# Altium PCB Controller.PcbDoc
Units mil, origin at the board's own origin, x right, y up, seen from the top; angles counter-clockwise.
Board outline 6000 x 4000 mil, 2 copper layers (Top Layer, Bottom Layer); 52 components, 35 nets, 186 pads, 0 vias.
Unrouted connection lines stored in the file: 109.
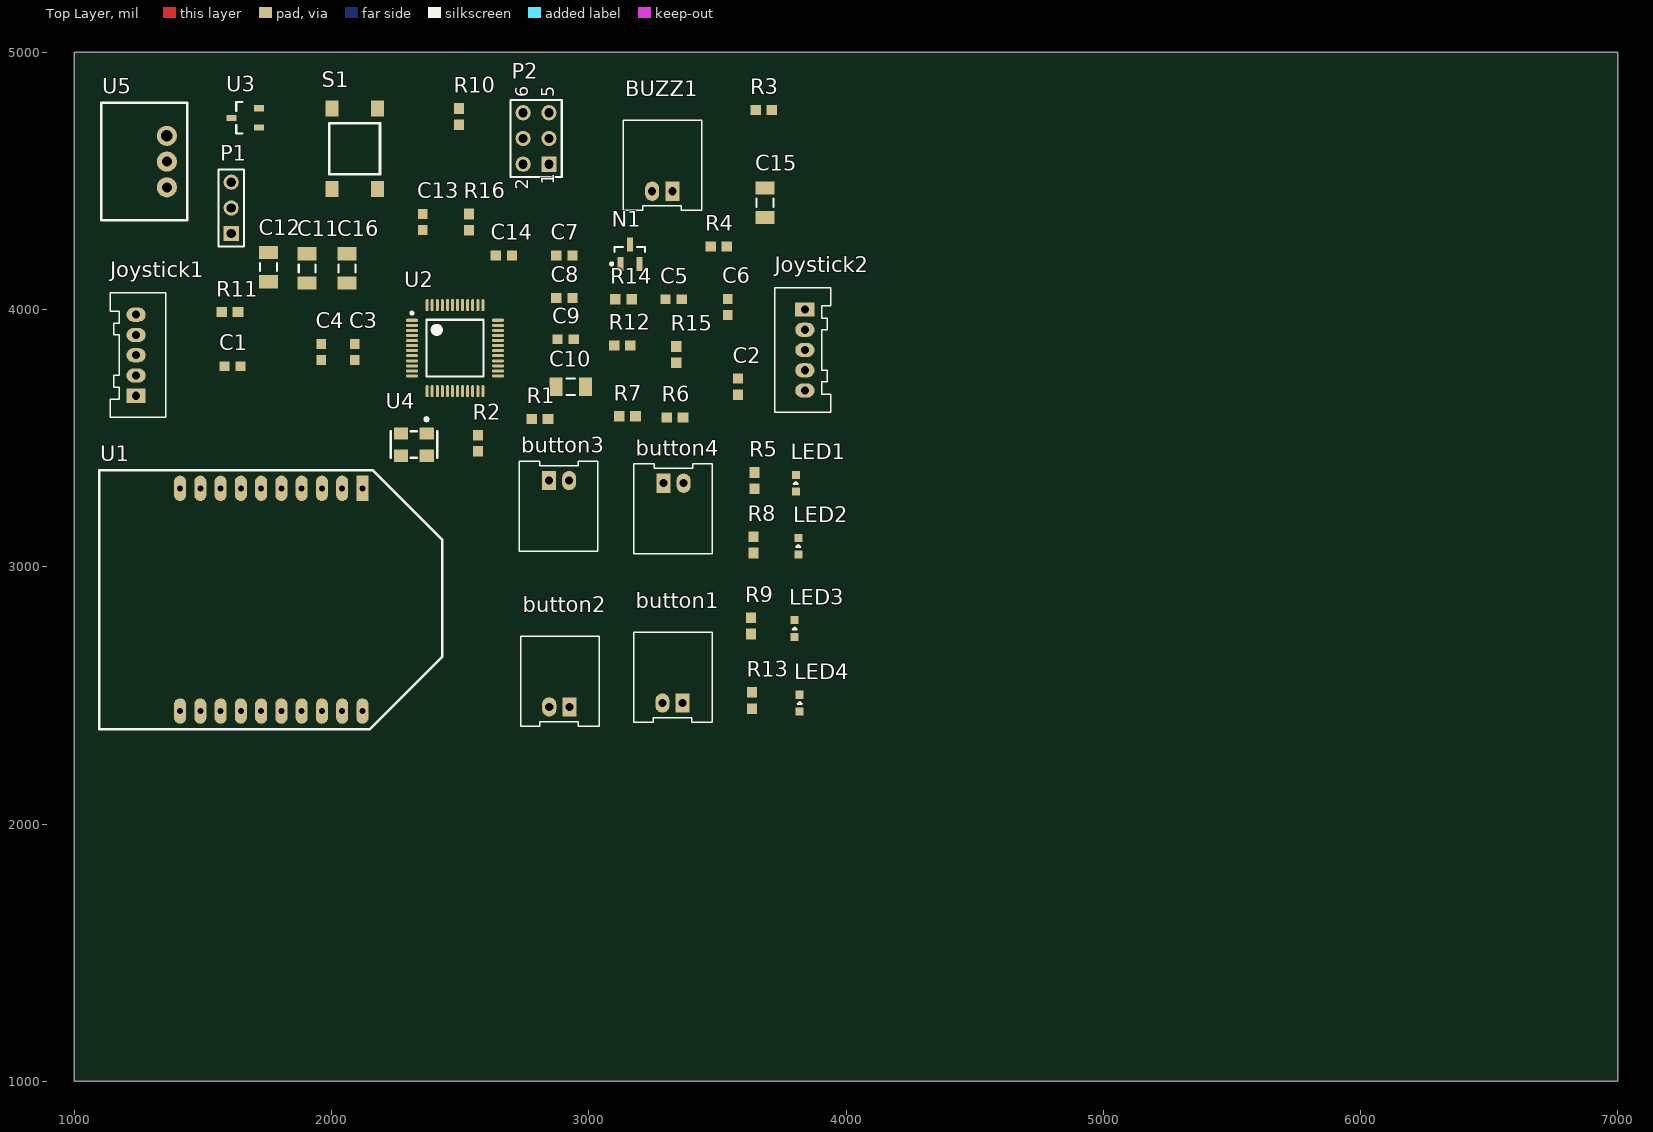
[diagram p0: Top Layer view]
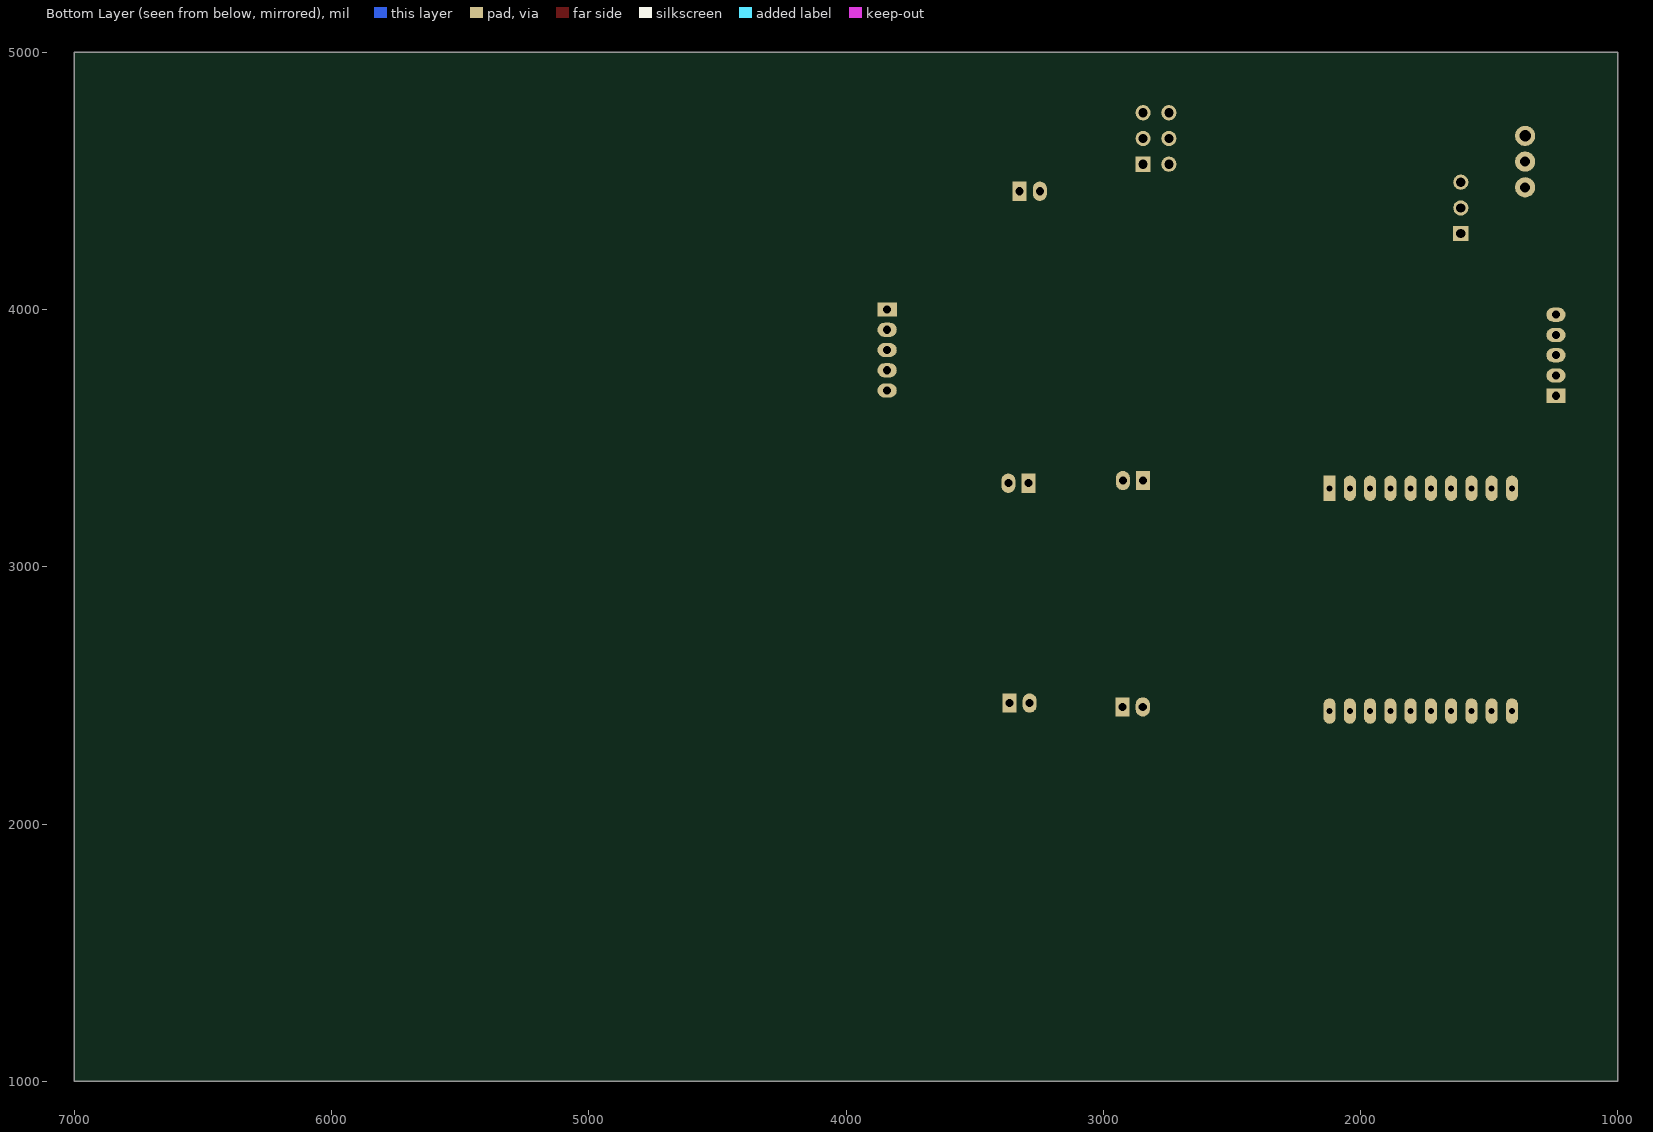
[diagram p1: Bottom Layer view, seen from below]

## Layer stack, top to bottom
Top Solder: solder mask 0.4, Solder Resist, Dk 3.5
Top Layer: signal copper 1.4
Dielectric 1: dielectric 12.6, FR-4, Dk 4.8
Bottom Layer: signal copper 1.4
Bottom Solder: solder mask 0.4, Solder Resist, Dk 3.5

## Board outline
1000,1000 7000,1000 7000,5000 1000,5000

## Design rules (kind name [scope] priority, off if disabled: settings)
Clearance [All] p1: gap=5
PolygonConnect [All] p1: connectstyle=Relief reliefconductorwidth=10 reliefentries=4 polygonreliefangle="90 Angle" airgapwidth=10
RoutingVias [All] p1: holewidth=17 width=25 viastyle="Through Hole" minholewidth=17 minwidth=25 maxholewidth=17 maxwidth=25
SolderMaskExpansion [All] p1: expansion=4
UnpouredPolygon [All] p1: allowunpoured=FALSE
Width [All] p1: maxlimit=30 minlimit=7 preferedwidth=25
29 further rules are at their usual default settings.

## Components (designator, comment, footprint, x,y, rotation, side; value= is the part's Value field where it differs from the comment)
button1 "2-pin Horz Sherlock" MOLEX-HDR-1X2-SHERLOCK-HORZ 3365,2470 r0 top
button2 "2-pin Horz Sherlock" MOLEX-HDR-1X2-SHERLOCK-HORZ 2925,2455 r0 top
button3 "2-pin Horz Sherlock" MOLEX-HDR-1X2-SHERLOCK-HORZ 2845,3335 r180 top
button4 "2-pin Horz Sherlock" MOLEX-HDR-1X2-SHERLOCK-HORZ 3290,3325 r180 top
BUZZ1 "2-pin Horz Sherlock" MOLEX-HDR-1X2-SHERLOCK-HORZ 3325,4460 r0 top
C1 "Cap" CAPC0603 1615,3780 r180 top
C2 "Cap" CAPC0603 3580,3700 r90 top
C3 "Cap" CAPC0603 2090,3835 r90 top
C4 "Cap" CAPC0603 1960,3835 r90 top
C5 "Cap" CAPC0603 3330,4040 r0 top
C6 "Cap" CAPC0603 3540,4010 r270 top
C7 "Cap" CAPC0603 2905,4210 r0 top
C8 "Cap" CAPC0603 2905,4045 r0 top
C9 "Cap" CAPC0603 2910,3885 r0 top
C10 "Cap" CAPC1206 2930,3700 r180 top
C11 "Cap" CAPC1206 1905,4160 r270 top
C12 "Cap" CAPC1206 1755,4165 r270 top
C13 "Cap" CAPC0603 2355,4340 r270 top
C14 "Cap" CAPC0603 2670,4210 r180 top
C15 "Cap" CAPC1206 3685,4415 r270 top
C16 "Cap" CAPC1206 2060,4160 r270 top
Joystick1 "MOLEX-HDR-1x5-SHERLOCK_VERT" MOLEX-HDR-1X5-SHERLOCK-VERT 1240,3665 r270 top
Joystick2 "MOLEX-HDR-1x5-SHERLOCK_VERT" MOLEX-HDR-1X5-SHERLOCK-VERT 3840,4000 r90 top
LED1 "LED" LED0603 3805,3325 r90 top
LED2 "LED" LED0603 3815,3080 r90 top
LED3 "LED" LED0603 3800,2760 r90 top
LED4 "LED" LED0603 3820,2470 r90 top
N1 "NMOSFET" 2N7002P,215 3160,4215 r90 top
P1 "3 Pin LCD" HDR1X3 1610,4295 r90 top
P2 "Header 3X2" HDR2X3 2845,4565 r90 top
R1 "Res" RES0603 2810,3575 r180 top
R2 "Res" RES0603 2570,3480 r90 top
R3 "Res" RES0603 3680,4775 r180 top
R4 "Res" RES0603 3505,4245 r0 top
R5 "Res" RES0603 3645,3335 r270 top
R6 "Res" RES0603 3335,3580 r0 top
R7 "Res" RES0603 3150,3585 r0 top
R8 "Res" RES0603 3640,3085 r90 top
R9 "Res" RES0603 3630,2770 r90 top
R10 "Res" RES0603 2495,4750 r90 top
R11 "Res" RES0603 1605,3990 r0 top
R12 "Res" RES0603 3130,3860 r180 top
R13 "Res" RES0603 3635,2480 r90 top
R14 "Res" RES0603 3135,4040 r180 top
R15 "Res" RES0603 3340,3825 r90 top
R16 "Res" RES0603 2535,4340 r90 top
S1 "Button" PTS645xxxxSMTR92 2090,4625 r90 top
U1 "XBee" XBee 2120,3305 r270 top
U2 "STM32F103C8T7" STM32F103C8T7 2480,3850 r0 top
U3 "MCP1703AT" MCP1703AT-xx02EDB 1665,4745 r180 top
U4 "636L3C008M" 636L3C 2320,3475 r180 top
U5 "R-78C5.0-1.0" R-78C5.0-1.0 1360,4475 r90 top

## Footprints (in the part's own frame and the unit in brackets; to place one, negate y for a bottom-side part, rotate by r counter-clockwise, add the part's x,y. Pads: shape width x height; smd on the part's side, far side on the other; paste and mask are expansions set on the pad)
2N7002P,215 [mm] "MOSFET N-CH SGL 60V SOT-23"
  rect 1.4x0.6 smd: 1(-0.95,0.95) 2(-0.95,-0.95) 3(0.95,0)
  silkscreen extent -1.07,-1.5 0.7,1.92, body extent -0.7,-1.5 0.7,1.5, height 1.1
636L3C [mm]
  rect 1.4x1.2 smd: 1(-1.27,-1.1) 2(1.27,-1.1) 3(1.27,1.1) 4(-1.27,1.1)
  silkscreen extent -2.3,-2.65 2.3,1.3, body extent -2.5,-1.6 2.5,1.6, height 2
CAPC0603 [mm] "Chip Capacitor, 2-Leads, Body 1.60x0.80mm, IPC Medium Density"
  rect 1x0.95 smd: 1(-0.8,0) 2(0.8,0)
  body extent -0.88,-0.48 0.87,0.48, height 0.8
CAPC1206 [mm] "Chip Capacitor, 2-Leads, Body 3.20x1.60mm, IPC Medium Density"
  rect 1.3x1.85 smd: 1(-1.45,0) 2(1.45,0)
  silkscreen extent -0.4,-0.82 0.4,0.82, body extent -1.7,-0.9 1.7,0.9, height 1.8
HDR1X3 [mm] "Connector; Header; 3 Position"
  rect 1.5x1.5 hole 0.9: 1(0,0)
  round 1.5 hole 0.9: 2(2.54,0) 3(5.08,0)
  silkscreen extent -1.27,-1.27 6.35,1.27
HDR2X3 [mm] "Connector; Header; 3x2 Position"
  rect 1.5x1.5 hole 0.9: 1(0,0)
  round 1.5 hole 0.9: 2(0,2.54) 3(2.54,0) 4(2.54,2.54) 5(5.08,0) 6(5.08,2.54)
  silkscreen extent -1.27,-1.27 6.35,3.81
LED0603 [mm] "Chip LED, 2-Leads, Body 1.60x0.80mm, IPC Medium Density"
  rect 0.8x0.8 smd: A(-0.825,0) C(0.825,0)
  silkscreen extent -0.13,-0.25 0.12,0.25, body extent -0.88,-0.48 0.87,0.47, height 0.8
MCP1703AT-xx02EDB [mm] "SOT23, 3-Leads, Body 2.90x2.55mm, Pitch 0.95mm, IPC Medium Density"
  rect 1x0.6 smd: 1(-1.35,0.95) 2(-1.35,-0.95) 3(1.35,0)
  silkscreen extent 0.3,-1.55 0.9,1.55, body extent -0.9,-1.55 0.9,1.55, height 1.45
MOLEX-HDR-1X2-SHERLOCK-HORZ [mm]
  rect 1.397x1.905 hole 0.8: 1(0,0)
  oval 1.397x1.905 hole 0.8: 2(-2,0)
  silkscreen extent -4.83,-1.91 2.92,6.98, body extent -4.83,-1.91 2.87,8.59, height 5.54
MOLEX-HDR-1X5-SHERLOCK-VERT [mm]
  rect 1.397x1.905 hole 0.8: 1(0,0)
  oval 1.397x1.905 hole 0.8: 2(-2,0) 3(-4,0) 4(-6,0) 5(-8,0)
  silkscreen extent -10.15,-2.55 2.15,2.95, body extent -10.16,-2.57 2.14,2.98, height 8.5
PTS645xxxxSMTR92 [mm] "PTS645 Series SMT 6 mm Tactile Switch"
  rect 1.555x1.3 smd: A(-3.975,2.25) A(3.975,2.25) B(-3.975,-2.25) B(3.975,-2.25)
  silkscreen extent -2.5,-2.5 2.5,2.5, body extent -3,-3 3,3, height 4.5
R-78C5.0-1.0 [mm] "CONV DC/DC 1A 5V OUT SIP VERT"
  round 2 hole 1: 1(0,0) 2(2.54,0)
  round 2 hole 1.15: 3(5.08,0)
  silkscreen extent -3.26,-2 8.34,6.5, body extent -3.2,-1.9 8.3,6.5, height 10.8
RES0603 [mm] "Chip Resistor, 2-Leads, Body 1.60x0.80mm, IPC Medium Density"
  rect 1.05x1 smd: 1(-0.8,0) 2(0.8,0)
  body extent -0.88,-0.48 0.87,0.47, height 0.8
STM32F103C8T7 [mm] "MCU ARM 32BIT 64K FLASH 48-LQFP"
  oval 1.2x0.3 smd mask+0.07: 1(-4.25,2.75) 2(-4.25,2.25) 3(-4.25,1.75) 4(-4.25,1.25) 5(-4.25,0.75) 6(-4.25,0.25) 7(-4.25,-0.25) 8(-4.25,-0.75) 9(-4.25,-1.25) 10(-4.25,-1.75) 11(-4.25,-2.25) 12(-4.25,-2.75) 25(4.25,-2.75) 26(4.25,-2.25) 27(4.25,-1.75) 28(4.25,-1.25) 29(4.25,-0.75) 30(4.25,-0.25) 31(4.25,0.25) 32(4.25,0.75) 33(4.25,1.25) 34(4.25,1.75) 35(4.25,2.25) 36(4.25,2.75)
  oval 0.3x1.2 smd mask+0.07: 13(-2.75,-4.25) 14(-2.25,-4.25) 15(-1.75,-4.25) 16(-1.25,-4.25) 17(-0.75,-4.25) 18(-0.25,-4.25) 19(0.25,-4.25) 20(0.75,-4.25) 21(1.25,-4.25) 22(1.75,-4.25) 23(2.25,-4.25) 24(2.75,-4.25) 37(2.75,4.25) 38(2.25,4.25) 39(1.75,4.25) 40(1.25,4.25) 41(0.75,4.25) 42(0.25,4.25) 43(-0.25,4.25) 44(-0.75,4.25) 45(-1.25,4.25) 46(-1.75,4.25) 47(-2.25,4.25) 48(-2.75,4.25)
  silkscreen extent -4.37,-2.8 2.8,3.57, body extent -3.5,-3.5 3.5,3.5, height 1.6
XBee [mm]
  rect 2.5x1.2 hole 0.6: 1(0,0)
  oval 2.5x1.2 hole 0.6: 2(0,-2) 3(0,-4) 4(0,-6) 5(0,-8) 6(0,-10) 7(0,-12) 8(0,-14) 9(0,-16) 10(0,-18) 11(22,-18) 12(22,-16) 13(22,-14) 14(22,-12) 15(22,-10) 16(22,-8) 17(22,-6) 18(22,-4) 19(22,-2) 20(22,0)
  silkscreen extent -1.8,-26 23.8,7.9, body extent -1.9,-26 23.8,8, height 4.06

## Part data
button1 button2 button3 button4 BUZZ1: library part MOLEX-HDR-1x2-SHERLOCK_RA, "Header, Molex, 2mm Pitch Sherlock Header, Single Row, Horizontal, 2 Circuits, Length 3.3mm,  0353630260"
Joystick1 Joystick2: "Header, Molex, 2mm Pitch Sherlock Header, Single Row, Vertical, 5 Circuits, Length 3.3mm, 0353620550"
N1: "NMOSFET Template"
P1: library part "Header 3", "NHD-0420D3Z-NSW-BBW-V3-ND"
P2: "Header, 3-Pin, Dual row"
S1: "SPST Button"
U1: "XBee radio"
U2: "MCU ARM 32BIT 64K FLASH 48-LQFP"
U3: "250 mA, 16V, Low Quiescent Current LDO Regulator"
U4: library part 636L3C, "HCMOS/TTL Clock Oscillator"
U5: "CONV DC/DC 1A 5V OUT SIP VERT"

## Nets (pads, with @x,y where several pads share a name; then routed paths per layer and width w, separated by ;. In a path a pad name is that pad's centre, name@x,y a point inside that pad or via, vN(x,y) a via of type N, cw(c..) or ccw(c..) an arc to the next point about the centre after c; other vN are vias at no path point)
3V3: C3.2 C4.2 C7.1 C8.1 C9.1 C10.2 C12.1 C14.1 P2.2 R1.1 R2.1 R6.1 R7.1 R16.1 U2.1 U2.24 U2.36 U2.48 U3.2 U4.4
5V: C11.1 C16.1 P1.3 U1.1 U3.3 U5.3
12V: BUZZ1.1 C15.1 R3.1 U5.1
BOOT0: R10.1 U2.44
BUTTON1: button1.1 R1.2 U2.18
BUTTON2: button2.1 R2.2 U2.19
BUTTON3: button3.1 R6.2 U2.20
BUTTON4: button4.1 R7.2 U2.39
BUZZER: N1.1 R4.1 U2.40
CLK8MHZ: U2.5 U4.3
GND: button1.2 button2.2 button3.2 button4.2 C1.1 C2.1 C5.1 C6.1 C7.2 C8.2 C9.2 C10.1 C11.2 C12.2 C13.2 C14.2 C15.2 C16.2 Joystick1.5 Joystick2.5 N1.2 P1.2 P2.6 R4.2 R5.2 R8.2 R9.2 R10.2 R13.2 S1.A U1.10 U2.8 U2.23 U2.35 U2.47 U3.1 U4.2 U5.2
LCD_IN: P1.1 U2.41
LED1: LED1.A U2.25
LED2: LED2.A U2.26
LED3: LED3.A U2.27
LED4: LED4.A U2.28
NetBUZZ1_2: BUZZ1.2 N1.3 R3.2
NetC1_2: C1.2 Joystick1.1 R11.1
NetC2_2: C2.2 Joystick2.1 R12.1
NetC3_1: C3.1 C4.1 U2.9
NetC5_2: C5.2 Joystick1.3 R14.1
NetC6_2: C6.2 Joystick2.3 R15.1
NetLED1_C: LED1.C R5.1
NetLED2_C: LED2.C R8.1
NetLED3_C: LED3.C R9.1
NetLED4_C: LED4.C R13.1
NRST: C13.1 P2.5 R16.2 S1.B U2.7
STICK1LR: R11.2 U2.45
STICK1UD: R14.2 U2.46
STICK2LR: R12.2 U2.21
STICK2UD: R15.2 U2.22
SWCLK: P2.3 U2.37
SWDIO: P2.1 U2.34
XBEE_RX: U1.11 U2.43
XBEE_TX: U1.20 U2.42
pads on no net: Joystick1.2 Joystick1.4 Joystick2.2 Joystick2.4 P2.4 U1.2 U1.3 U1.4 U1.5 U1.6 U1.7 U1.8 U1.9 U1.12 U1.13 U1.14 U1.15 U1.16 U1.17 U1.18 U1.19 U2.2 U2.3 U2.4 U2.6 U2.10 U2.11 U2.12 U2.13 U2.14 U2.15 U2.16 U2.17 U2.29 U2.30 U2.31 U2.32 U2.33 U2.38 U4.1

## Text inside footprints (layer, text, board x,y; h text height)
P2: Top Overlay "6" at 2765,4825 h50 r90; Top Overlay "5" at 2865,4825 h50 r90; Top Overlay "2" at 2765,4465 h50 r90; Top Overlay "1" at 2865,4485 h50 r90